# Altium PCB Printhead.PcbDoc
Units mm, origin at the board's own origin, x right, y up, seen from the top; angles counter-clockwise.
Board outline 36 x 57.8 mm, 4 copper layers (Component Side, Signal Layer 1, Signal Layer 2, Solder Side), stack 0.98 mm thick; 91 components, 46 nets, 258 pads, 114 vias.
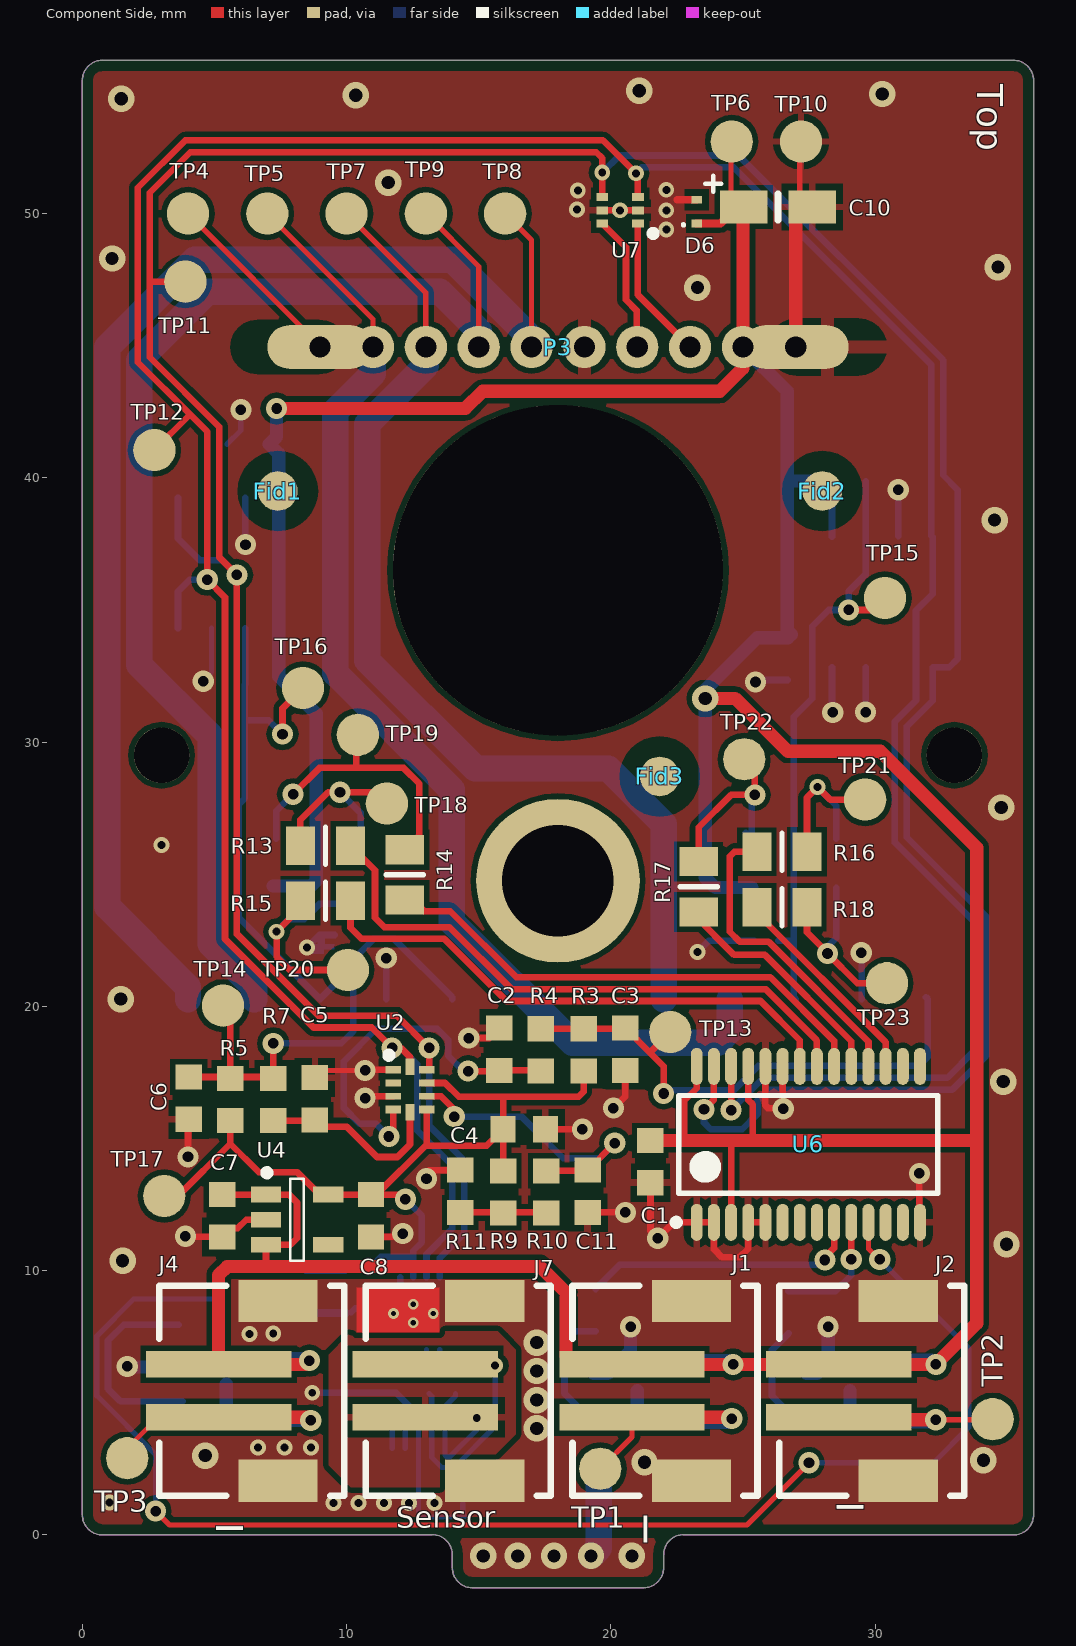
[diagram p0: Component Side view]
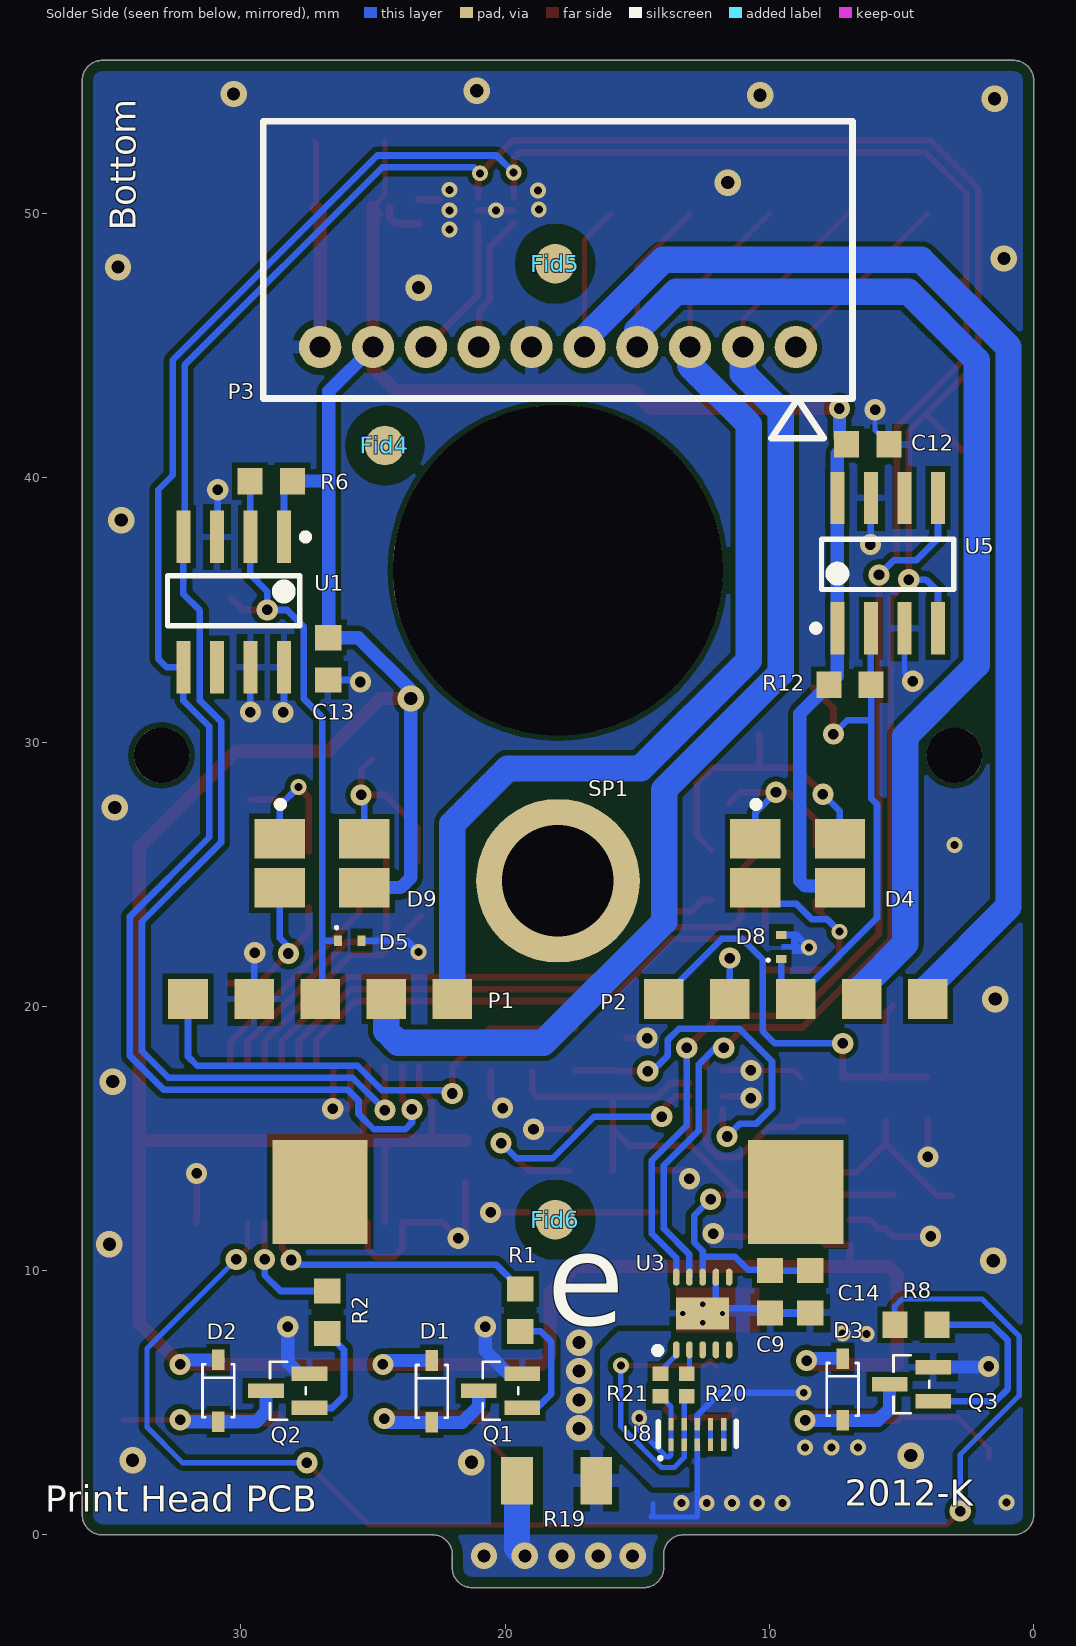
[diagram p1: Solder Side view, seen from below]
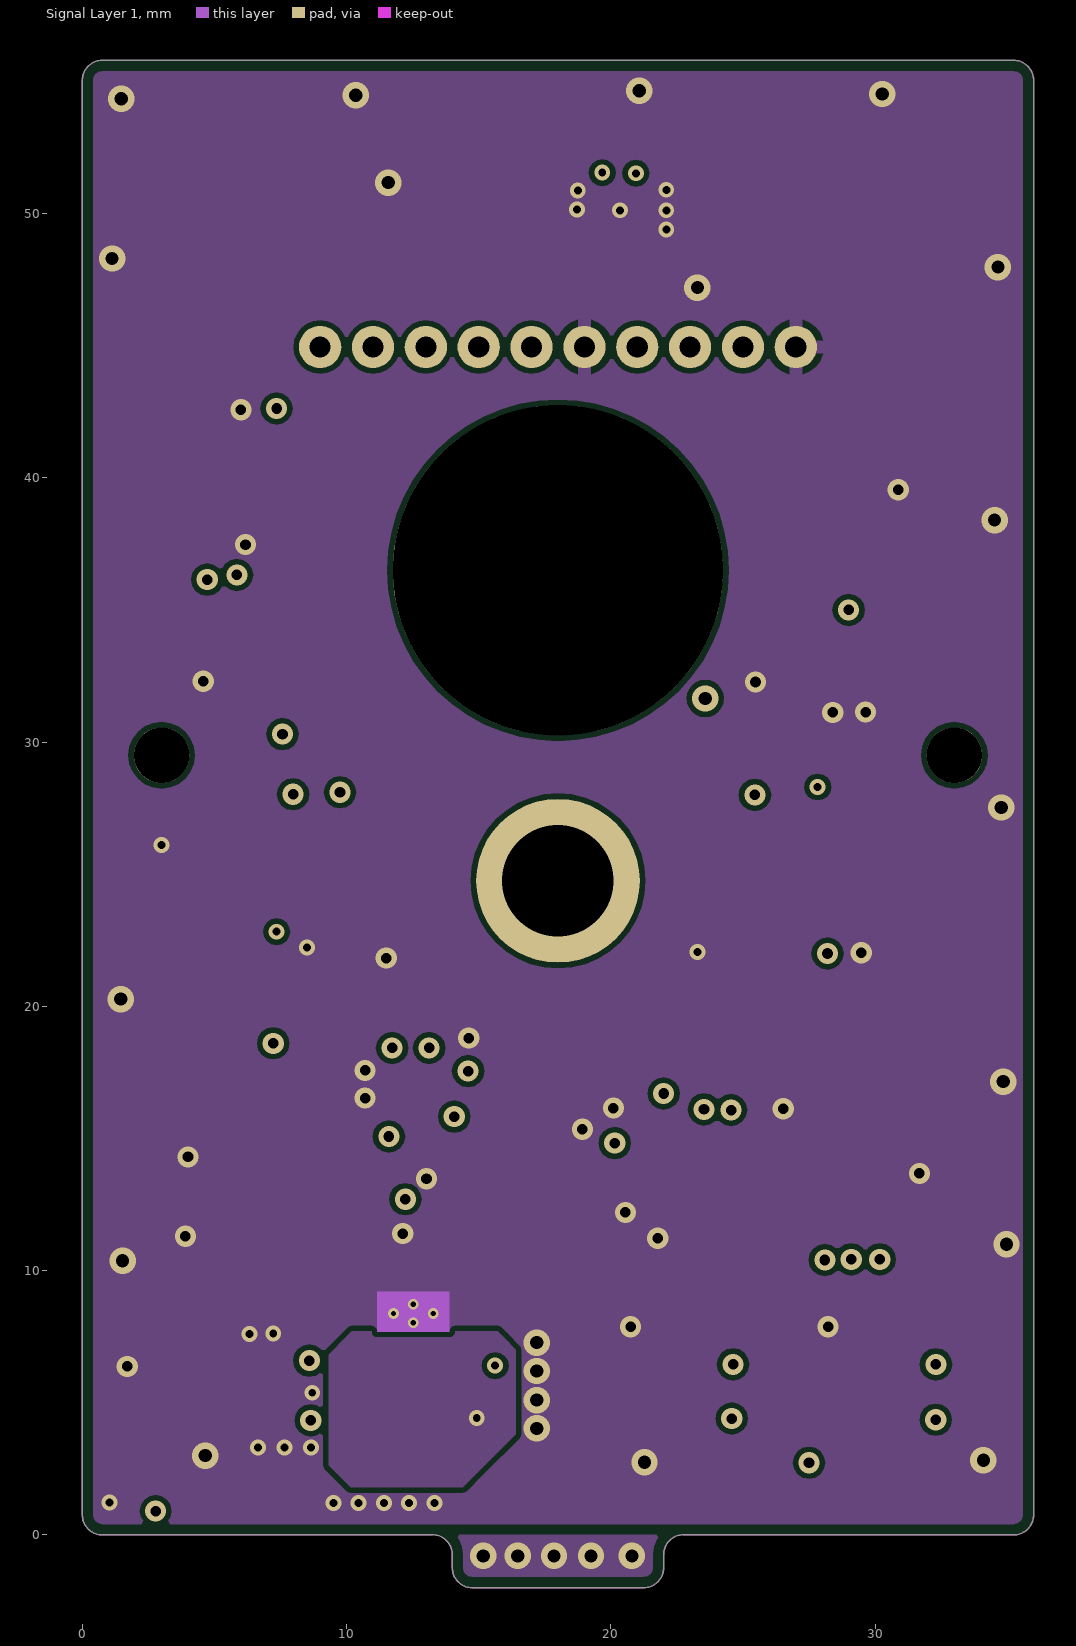
[diagram p2: Signal Layer 1]
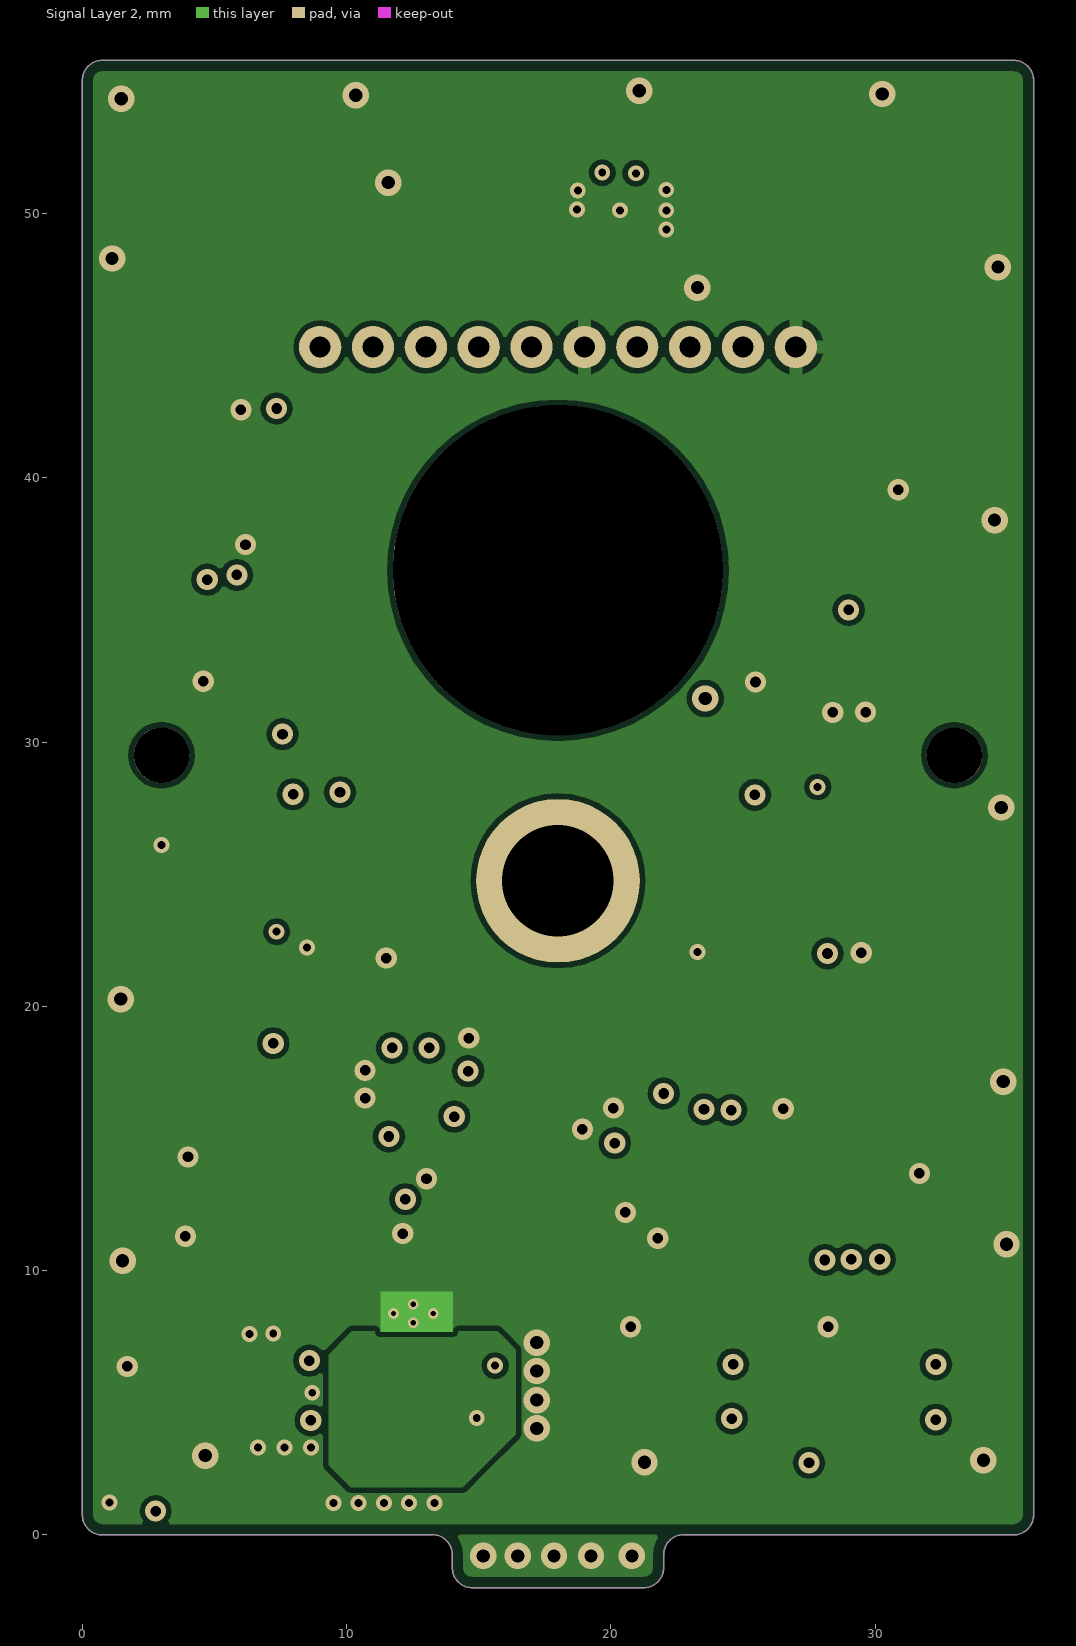
[diagram p3: Signal Layer 2]

## Layer stack, top to bottom
Top Solder: solder mask 0.0102, Solder Resist, Dk 3.5
Component Side: signal copper 0.0356
Dielectric1: core 0.32, FR-4, Dk 4.8
Signal Layer 1: signal copper 0.036
Dielectric2: prepreg 0.2625, Dk 4.2
Signal Layer 2: signal copper 0.036
Dielectric3: core 0.254, Dk 4.2
Solder Side: signal copper 0.0356
Bottom Solder: solder mask 0.0102, Solder Resist, Dk 3.5

## Board outline
13.25,0 cw(c13.25,-0.75) 14,-0.75 14,-1.25 ccw(c14.75,-1.25) 14.75,-2 21.25,-2 ccw(c21.25,-1.25) 22,-1.25 22,-0.75 cw(c22.75,-0.75) 22.75,0 35.25,0 ccw(c35.25,0.75) 36,0.75 36,55.05 ccw(c35.25,55.05) 35.25,55.8 0.75,55.8 ccw(c0.75,55.05) 0,55.05 0,0.75 ccw(c0.75,0.75) 0.75,0

## Design rules (kind name [scope] priority, off if disabled: settings)
Clearance Clearance_USB_GND [InNet('USB_GND')] p1: gap=0.4
Clearance Clearance_U1_to_copper [InComponent('U2') vs InPolygon] p2: gap=0.2
Clearance Clearance_U2 [InComponent('U2')] p3: gap=0.1
Clearance Fiducials [(InComponent('Fid1'))or (InComponent('Fid2'))or  (InComponent('Fid3'))or (InComponent('Fid4'))or (InComponent('Fid5'))or  (InComponent('Fid6'))] p4: gap=0.762
Clearance Outline_clearance [InPolygon vs OnLayer('Keep-Out Layer')] p5: gap=0.4
Clearance [All] p6: gap=0.2
MinimumSolderMaskSliver [All] p1: minsoldermaskwidth=0.051
PolygonConnect PolygonConnect_connectors [InComponent('J4', 'J7', 'J1', 'J2') vs InNet('GND')] p1: connectstyle=Direct reliefconductorwidth=0.254 reliefentries=4 polygonreliefangle="90 Angle" airgapwidth=0.254
PolygonConnect PolygonConnect_P3 [InComponent('P3', 'R19')] p2: connectstyle=Relief reliefconductorwidth=0.508 reliefentries=4 polygonreliefangle="90 Angle" airgapwidth=0.254
PolygonConnect PolygonConnect_diodes [InComponent('D6') or InComponent('D9') or InComponent('D8')] p3: connectstyle=NoConnect reliefconductorwidth=0.254 reliefentries=4 polygonreliefangle="90 Angle" airgapwidth=0.254
PolygonConnect PolygonConnect_SHIELD [All vs IsVia] p4: connectstyle=Direct reliefconductorwidth=0.254 reliefentries=4 polygonreliefangle="90 Angle" airgapwidth=0.254
PolygonConnect [All] p5: connectstyle=Relief reliefconductorwidth=0.254 reliefentries=4 polygonreliefangle="90 Angle" airgapwidth=0.254
RoutingVias [All] p1: holewidth=0.711 width=1.27 viastyle="Through Hole" minholewidth=0.3 minwidth=0.7 maxholewidth=0.711 maxwidth=1.27
SilkToSilkClearance [All] p1: silktosilkclearance=0
SilkToSolderMaskClearance [IsPad] p1: minsilkscreentomaskgap=0.127 clearancetoexposedcopper=TRUE
SolderMaskExpansion [All] p1: expansion=0.102
Width [All] p1: maxlimit=4 minlimit=0.2 preferedwidth=0.2
27 further rules are at their usual default settings.

## Classes and differential pairs
component class Printhead: C2 C3 C4 C5 C6 C7 C8 C9 C10 C11 C12 C13 C14 D6 D8 D9 Fid1 Fid2 Fid3 Fid4 Fid5 Fid6 J7 P1 P2 P3 R3 R4 R5 R6 R7 R9 R10 R11 R12 R19 R20 R21 SP1 TP4 TP5 TP6 TP7 TP8 TP9 TP10 TP11 TP12 TP13 TP14 TP15 TP16 TP17 U1 U2 U3 U4 U5 U7 U8
component class Printhead2: C1 D1 D2 D3 D4 D5 J1 J2 J4 Q1 Q2 Q3 R1 R2 R8 R13 R14 R15 R16 R17 R18 TP1 TP2 TP3 TP18 TP19 TP20 TP21 TP22 TP23 U6

## Components (designator, comment, footprint, x,y, rotation, side; value= is the part's Value field where it differs from the comment)
C1 "100nF" CAPC1608X09N 21.5,14.125 r90 top
C2 "1uF" CAPC1608X09N 15.775,18.375 r270 top
C3 "100nF" CAPC1608X09N 20.55,18.375 r90 top
C4 "100nF" CAPC1608X09N 16.725,15.35 r180 top
C5 "1uF" CAPC1608X09N 8.8,16.5 r270 top
C6 "100nF" CAPC1608X09N 4.025,16.525 r90 top
C7 "1uF" CAPC1608X09N 5.3,12.075 r90 top
C8 "2.2uF" CAPC1608X09N 10.925,12.075 r90 top
C9 "100nF" CAPC1608X09N 9.975,9.2 r90 bottom
C10 "10uF" CAPMP3216X18N 26.325,50.25 r0 top
C11 "1uF" CAPC1608X09N 19.125,13 r90 top
C12 "100nF" CAPC1608X09N 6.275,41.275 r0 bottom
C13 "100nF" CAPC1608X09N 26.7,33.15 r90 bottom
C14 "1uF" CAPC1608X09N 8.45,9.2 r90 bottom
D1 "DB2J50100L" SODFL2512X80N 22.775,5.425 r270 bottom
D2 "DB2J50100L" SODFL2512X80N 30.85,5.45 r270 bottom
D3 "DB2J50100L" SODFL2512X80N 7.225,5.5 r270 bottom
D4 "LED RGB" "DIALIGHT 598-8610-307F" 8.932,25.417 r180 bottom locked
D5 "LED RGB" "DIALIGHT 598-8610-307F" 26.932,25.417 r180 bottom locked
D6 "ESD9X5.0ST5G" SODFL100X40-2N 23.25,50.075 r90 top
D8 "ESD9L5.0ST5G" SODFL100X40-2N 9.546,22.248 r90 bottom
D9 "ESD9L5.0ST5G" SODFL100X40-2N 25.879,22.475 r180 bottom
Fid1 "Fiducial" "Fiducial 1,5mm"#1 8,39.5 r0 top
Fid2 "Fiducial" "Fiducial 1,5mm"#2 48.325,38.925 r90 top
Fid3 "Fiducial" "Fiducial 1,5mm"#1 21.85,29.3 r90 top
Fid4 "Fiducial" "Fiducial 1,5mm"#1 24.55,41.825 r90 bottom
Fid5 "Fiducial" "Fiducial 1,5mm"#3 20.05,48.7 r90 bottom
Fid6 "Fiducial" "Fiducial 1,5mm"#4 18.175,12.525 r90 bottom
J1 "B2B-PH-SM4-TB" B2B-PH-SM4-TB 18.05,1.475 r270 top locked
J2 "B2B-PH-SM4-TB" B2B-PH-SM4-TB 25.875,1.475 r270 top locked
J4 "B2B-PH-SM4-TB" B2B-PH-SM4-TB 2.408,1.475 r270 top locked
J7 "B2B-PH-SM4-TB" B2B-PH-SM4-TB 10.225,1.475 r270 top locked
P1 "Header 5" "AVX 9155005003016" 33.25,11 r0 bottom locked
P2 "Header 5" "AVX 9155005003016" 15.25,11 r0 bottom locked
P3 "353631060" 353631060 18,53.5 r180 bottom locked
Q1 "PBSS4140U" SOT65P210X110-3N 20.175,5.45 r0 bottom
Q2 "PBSS4140U" SOT65P210X110-3N 28.225,5.45 r0 bottom
Q3 "PBSS4140U" SOT65P210X110-3N 4.625,5.7 r0 bottom
R1 "330E" RESC1608X05N 19.425,8.5 r270 bottom
R2 "330E" RESC1608X05N 26.725,8.425 r270 bottom
R3 "1k21 0.1%" RESC1608X05N 18.975,18.35 r270 top
R4 "330E" RESC1608X05N 17.35,18.35 r90 top
R5 "1k21 0.1%" RESC1608X05N 5.6,16.475 r270 top
R6 "1K5" RESC1608X05N 28.85,39.875 r180 bottom
R7 "330E" RESC1608X05N 7.225,16.475 r90 top
R8 "330E" RESC1608X05N 4.45,7.95 r180 bottom
R9 "1k21 0.1%" RESC1608X05N 15.925,12.975 r90 top
R10 "330E" RESC1608X05N 17.55,12.975 r270 top
R11 "205R 0.1%" RESC1608X05N 14.3,13 r270 top
R12 "1K5" RESC1608X05N 6.95,32.175 r0 bottom
R13 "100E" "R0805 (2012)" 9.2,26.075 r180 top
R14 "150E" "R0805 (2012)" 12.2,24.975 r90 top
R15 "100E" "R0805 (2012)" 9.2,24 r180 top
R16 "100E" "R0805 (2012)" 26.475,25.85 r0 top
R17 "150E" "R0805 (2012)" 23.325,24.525 r90 top
R18 "100E" "R0805 (2012)" 26.475,23.75 r0 top
R19 "0R" R1206 18.05,2.05 r180 bottom
R20 "0402" cap0402 13.125,5.675 r270 bottom
R21 "0402" cap0402 14.125,5.675 r270 bottom
SP1 "M2.5-2ET" "SPACER M25-2ET" 18,24.75 r180 bottom locked
TP1 "Testpoint 1.6mm" "Testpoint 1.6mm"#1 19.6,2.5 r0 top
TP2 "Testpoint 1.6mm" "Testpoint 1.6mm"#1 34.45,4.375 r90 top
TP3 "Testpoint 1.6mm" "Testpoint 1.6mm"#1 1.7,2.9 r90 top
TP4 "Testpoint 1.6mm" "Testpoint 1.6mm"#2 4.95,50 r90 top
TP5 "Testpoint 1.6mm" "Testpoint 1.6mm"#3 8.125,50.05 r90 top
TP6 "Testpoint 1.6mm" "Testpoint 1.6mm"#1 24.575,52.725 r90 top
TP7 "Testpoint 1.6mm" "Testpoint 1.6mm"#4 11.15,50.05 r90 top
TP8 "Testpoint 1.6mm" "Testpoint 1.6mm"#5 16.6,50.05 r90 top
TP9 "Testpoint 1.6mm" "Testpoint 1.6mm"#6 14,50.025 r90 top
TP10 "Testpoint 1.6mm" "TESTPOINT 1.6MM"#1 27.2,52.8 r90 top
TP11 "Testpoint 1.6mm" "Testpoint 1.6mm"#7 3.9,47.5 r90 top
TP12 "Testpoint 1.6mm" "Testpoint 1.6mm"#8 2.275,41.175 r90 top
TP13 "Testpoint 1.6mm" "TESTPOINT 1.6MM"#2 22.25,19.025 r90 top
TP14 "Testpoint 1.6mm" "TESTPOINT 1.6MM"#2 5.325,20.025 r90 top
TP15 "Testpoint 1.6mm" "Testpoint 1.6mm"#1 30.375,35.45 r90 top
TP16 "Testpoint 1.6mm" "TESTPOINT 1.6MM"#2 8.35,32.05 r90 top
TP17 "Testpoint 1.6mm" "TESTPOINT 1.6MM"#2 3.1,12.825 r90 top
TP18 "Testpoint 1.6mm" "Testpoint 1.6mm"#1 11.525,27.675 r90 top
TP19 "Testpoint 1.6mm" "Testpoint 1.6mm"#1 10.425,30.275 r90 top
TP20 "Testpoint 1.6mm" "Testpoint 1.6mm"#1 10.05,21.375 r90 top
TP21 "Testpoint 1.6mm" "Testpoint 1.6mm"#1 29.625,27.825 r90 top
TP22 "Testpoint 1.6mm" "Testpoint 1.6mm"#1 25.05,29.35 r90 top
TP23 "Testpoint 1.6mm" "Testpoint 1.6mm"#1 30.45,20.875 r90 top
U1 "DS2482-100" SOIC127P600X175-8N 30.275,35.3 r270 bottom
U2 "ADS1015IRUG" TI-RUG10_V 12.4,16.85 r270 top
U3 "FDC1004DSCT" SON50P300X300X80-11N 12.525,8.375 r90 bottom
U4 "LP2985A-33DBV" SOT95P275X110-5N 8.125,11.925 r0 top
U5 "DS2482-100" SOIC127P600X175-8N 5.525,36.775 r90 bottom
U6 "PCA9635" TSOP65P640X110-28N 27.475,14.775 r90 top locked
U7 "NUF2230" SOTFL50P160X60-6N 20.35,50.125 r180 top
U8 "PUSB3FR4" QFN0P250X100X50-10N 12.725,3.8 r180 bottom

## Footprints (in the part's own frame and the unit in brackets; to place one, negate y for a bottom-side part, rotate by r counter-clockwise, add the part's x,y. Pads: shape width x height; smd on the part's side, far side on the other; paste and mask are expansions set on the pad)
353631060 [mm] "Molex 353631060"
  oval 4x1.65 smd far side paste-2 mask+0: 1(9,-8.55) 10(-9,-8.55)
  round 1.6 hole 0.8: 1(9,-8.55) 2(7,-8.55) 3(5,-8.55) 4(3,-8.55) 5(1,-8.55) 6(-1,-8.55) 7(-3,-8.55) 8(-5,-8.55) 9(-7,-8.55) 10(-9,-8.55)
  silkscreen extent -11.15,-12 11.15,0, body extent -11.15,-10.5 11.15,0, height 5.5
"AVX 9155005003016" [mm] "CONNECTOR, BATTERY, 5 POS, 2.3MM"
  rect 3.6x3.95 smd: 0(-6.25,-1.975)
  rect 1.5x1.5 smd: 1(-1.25,-9.275) 2(-3.75,-9.275) 3(-6.25,-9.275) 4(-8.75,-9.275) 5(-11.25,-9.275)
  body extent -12.5,-9.55 0,0, height 5.48
B2B-PH-SM4-TB [mm] "JST B2B-PH-SM4-TB"
  rect 1.6x3 smd: 0(-7.375,5) 0(-0.575,5)
  rect 1x5.5 smd: 1(-4.975,2.75) 2(-2.975,2.75)
  silkscreen extent -7.95,0.5 0,7.5, body extent -7.95,0.5 0,7.5, height 6.61
cap0402 [mm] "0402"
  rect 0.55x0.6 smd: 1(-0.425,0) 2(0.425,0)
  body extent -0.55,-0.3 0.55,0.3, height 0.4
CAPC1608X09N [mm] "Chip Capacitor, 2-Leads, Body 1.6x0.8mm, IPC Medium Density"
  rect 0.95x1 smd: 1(-0.8,0) 2(0.8,0)
  Component Side pour cut-out: -0.3,0.6 0.3,0.6 0.3,-0.6 -0.3,-0.6
  body extent -0.85,-0.45 0.85,0.45, height 0.9
CAPMP3216X18N [mm] "Molded Capacitor, 2-Leads, Body 3.2x1.6mm, IPC Medium Density"
  rect 1.8x1.25 smd: 1(-1.3,0) 2(1.3,0)
  silkscreen extent -2.75,-0.51 0,1.17, body extent -1.7,-0.9 1.7,0.9, height 1.8
"DIALIGHT 598-8610-307F" [mm] "Dialight RGB led"
  rect 1.9x1.5 smd: 1(-1.6,0.925) 2(1.6,0.925) 3(-1.6,-0.925) 4(1.6,-0.925)
  silkscreen extent -1.7,2.1 -1.45,2.35, body extent -1.6,-1.35 1.6,1.35, height 0.7
"Fiducial 1,5mm"#1 [mm] "Fiducial 1,5mm"
  round 1.5 smd paste-3 mask+0.75: ""(-0.6,0)
"Fiducial 1,5mm"#2 [mm] "Fiducial 1,5mm"
  round 1.5 smd paste-3 mask+0.75: ""(0.575,20.325)
"Fiducial 1,5mm"#3 [mm] "Fiducial 1,5mm"
  round 1.5 smd paste-3 mask+0.75: ""(-0.6,-1.95)
"Fiducial 1,5mm"#4 [mm] "Fiducial 1,5mm"
  round 1.5 smd paste-3 mask+0.75: ""(-0.6,-0.075)
QFN0P250X100X50-10N [mm] "QFN, 10-Leads, Body 2,50x1,00mm, Pitch 0,50mm/0,00mm, IPC Medium Density"
  rect 0.2x0.475 smd: 1(-1,-0.387) 1(-1,0.387) 2(-0.5,-0.387) 2(-0.5,0.387) 3(0,-0.387) 3(0,0.387) 4(0.5,-0.387) 4(0.5,0.387) 5(1,-0.387) 5(1,0.387)
  Component Side lines w0.2: 1,-0.525 1,-0.387 1,0.387 1,0.525 ; 0.5,-0.525 0.5,-0.387 0.5,0.387 0.5,0.525 ; 0,-0.525 0,-0.387 0,0.387 0,0.525 ; -0.5,-0.525 -0.5,-0.387 -0.5,0.387 -0.5,0.525 ; -1,-0.525 -1,-0.387 -1,0.387 -1,0.525
  silkscreen extent -1.48,-0.92 1.48,0.5, body extent -1.3,-0.55 1.3,0.55, height 0.5
"R0805 (2012)" [mm] "hip Resistor, 2-Leads, Body 2,0x1.25mm, IPC Medium Density"
  rect 1.1x1.45 smd: 1(-0.95,0) 2(0.95,0)
  silkscreen extent 0,-0.7 0,0.7, body extent -1,-0.6 1,0.65, height 0.44
R1206 [mm]
  rect 1.2x1.8 smd: 1(-1.5,0) 2(1.5,0)
  body extent -1.6,-0.8 1.6,0.8, height 0.55
RESC1608X05N [mm] "Chip Resistor, 2-Leads, Body 1.6x0.8mm, IPC Medium Density"
  rect 0.95x1 smd: 1(-0.8,0) 2(0.8,0)
  Component Side pour cut-out: -0.3,0.6 0.3,0.6 0.3,-0.6 -0.3,-0.6
  body extent -0.85,-0.48 0.85,0.47, height 0.5
SODFL100X40-2N [mm] "SODFL, 2-Leads, Body 0,60x1,00mm, IPC Medium Density"
  rect 0.3x0.4 smd: 1(-0.45,0) 2(0.45,0)
  silkscreen extent -0.55,0.45 -0.45,0.55, body extent -0.42,-0.33 0.43,0.33, height 0.4
SODFL2512X80N [mm]
  rect 0.78x0.47 smd: 1(-1.17,0) 2(1.17,0)
  silkscreen extent -1,-0.6 1,0.6, body extent -1,-0.6 1,0.6, height 0.75
SOIC127P600X175-8N [mm] "SOIC, 8-Leads, Body 4,90x3,90mm, Pitch 1,27mm, IPC Medium Density"
  rect 1.98x0.53 smd: 1(-2.465,1.905) 2(-2.465,0.635) 3(-2.465,-0.635) 4(-2.465,-1.905) 5(2.465,-1.905) 6(2.465,-0.635) 7(2.465,0.635) 8(2.465,1.905)
  silkscreen extent -2.59,-2.5 0.9,2.84, body extent -2,-2.5 2,2.5, height 1.75
SON50P300X300X80-11N [mm]
  oval 0.65x0.25 smd mask+0.07: 1(-1.375,1) 2(-1.375,0.5) 3(-1.375,0) 4(-1.375,-0.5) 5(-1.375,-1) 6(1.375,-1) 7(1.375,-0.5) 8(1.375,0) 9(1.375,0.5) 10(1.375,1)
  rect 1.2x2 smd mask+0.07: 11(0,0)
  silkscreen extent -1.52,1.58 -1.28,1.83, body extent -1.5,-1.5 1.5,1.5, height 0.8
SOT65P210X110-3N [mm] "SOT23, 3-Leads, Body 2.2x2.2mm (max), Pitch 0.65mm, IPC Medium Density"
  rect 1.35x0.55 smd: 1(-0.825,0.65) 2(-0.825,-0.65) 3(0.825,0)
  silkscreen extent -0.67,-1.1 0.67,1.1, body extent -0.67,-1.1 0.67,1.1, height 1.1
SOT95P275X110-5N [mm] "SOT23, 5-Leads, Body 3.1x3.0mm (max), Pitch 0.95mm, IPC Medium Density"
  rect 1.15x0.6 smd: 1(-1.175,0.95) 2(-1.175,0) 3(-1.175,-0.95) 4(1.175,-0.95) 5(1.175,0.95)
  silkscreen extent -1.27,-1.55 0.25,1.9, body extent -1.4,-1.45 1.4,1.45, height 1.2
SOTFL50P160X60-6N [mm] "SOTFL, 6-Leads, Body 1,60x1,60mm, Pitch 0,50mm, IPC Medium Density"
  rect 0.45x0.3 smd: 1(-0.675,0.5) 2(-0.675,0) 3(-0.675,-0.5) 4(0.675,-0.5) 5(0.675,0) 6(0.675,0.5)
  silkscreen extent -1.38,0.75 -1.13,1, body extent -0.65,-0.85 0.65,0.85, height 0.6
"SPACER M25-2ET" [mm] "Spacer M25-2ET"
  round 6.2 hole 4.22 unplated: 0(0,0)
  body extent -2.75,-2.75 2.75,2.75, height 2
"Testpoint 1.6mm"#1 [mm]
  round 1.6 smd paste-2 mask+0: 1(0,0)
"Testpoint 1.6mm"#2 [mm]
  round 1.6 smd paste-2 mask+0: 1(0,0.95)
"Testpoint 1.6mm"#3 [mm]
  round 1.6 smd paste-2 mask+0: 1(-0.05,1.125)
"Testpoint 1.6mm"#4 [mm]
  round 1.6 smd paste-2 mask+0: 1(-0.05,1.15)
"Testpoint 1.6mm"#5 [mm]
  round 1.6 smd paste-2 mask+0: 1(-0.05,0.6)
"Testpoint 1.6mm"#6 [mm]
  round 1.6 smd paste-2 mask+0: 1(-0.025,1)
"Testpoint 1.6mm"#7 [mm]
  round 1.6 smd paste-2 mask+0: 1(-0.075,0)
"Testpoint 1.6mm"#8 [mm]
  round 1.6 smd paste-2 mask+0: 1(-0.125,-0.45)
"TESTPOINT 1.6MM"#1 [mm]
  round 1.6 smd paste-2 mask+0: 1(-0.075,0)
"TESTPOINT 1.6MM"#2 [mm]
  round 1.6 smd paste-2 mask+0: 1(0,0)
TI-RUG10_V [mm] "QFN, 10-Leads, Body 2x1.5mm"
  rect 0.3x0.58 smd: 1(-0.75,-0.635) 4(0.75,-0.635) 6(0.75,0.635) 9(-0.75,0.635)
  rect 0.25x0.58 smd: 2(-0.25,-0.635) 3(0.25,-0.635) 7(0.25,0.635) 8(-0.25,0.635)
  rect 0.63x0.35 smd: 5(0.86,0) 10(-0.86,0)
  silkscreen extent -1.42,-0.92 -1.18,-0.67, body extent -1,-0.75 1,0.75, height 0.4
TSOP65P640X110-28N [mm] "TSOP, 28-Leads, Body 9,70x4,40mm, Pitch 0,65mm, IPC Medium Density"
  oval 1.4x0.45 smd: 1(-2.95,4.225) 2(-2.95,3.575) 3(-2.95,2.925) 4(-2.95,2.275) 5(-2.95,1.625) 6(-2.95,0.975) 7(-2.95,0.325) 8(-2.95,-0.325) 9(-2.95,-0.975) 10(-2.95,-1.625) 11(-2.95,-2.275) 12(-2.95,-2.925) 13(-2.95,-3.575) 14(-2.95,-4.225) 15(2.95,-4.225) 16(2.95,-3.575) 17(2.95,-2.925) 18(2.95,-2.275) 19(2.95,-1.625) 20(2.95,-0.975) 21(2.95,-0.325) 22(2.95,0.325) 23(2.95,0.975) 24(2.95,1.625) 25(2.95,2.275) 26(2.95,2.925) 27(2.95,3.575) 28(2.95,4.225)
  silkscreen extent -3.07,-4.9 1.85,5.12, body extent -2.25,-4.9 2.25,4.9, height 1.1

## Part data
C1 C3 C4 C6 C9 C12 C13: library part 100nF/50V/0603, "CAP CER 0.1UF 50V 10% X7R 0603"
C2 C5 C7 C11 C14: library part 1uF/10V/0603, "CAP CER 1UF 10V 10% X5R 0603"
C8: library part 2.2.uF/10V/0603, "CAP CER 2.2UF 10V 20% X5R 0603"
C10: library part 10uF/10V/SizeA, "CAP TANT 10UF 10V 20% 1206"
D1 D2 D3: "DIODE SCHOTTKY 50V 200MA MINI2"
D4 D5: library part "LED 598-8810-307F", "LED MULTICOLOR RED/GRN/BLUE"
D6: "TVS DIODE 5VWM 12.3VC SOD923"
Fid1 Fid2 Fid3 Fid4 Fid5 Fid6: library part Library_MISC-0003
J1 J2 J4 J7: library part "Header 2", "JST B2B-PH-SM4-TB"
P1 P2: "Header, 5-Pin"
P3: library part "Header 5X2", "Molex 353631060"
Q1 Q2 Q3: "TRANS NPN 40V 1000MA SOT323"
R1 R2 R4 R7 R8 R10: library part 330E/0603, "RES 330 OHM 1/10W 1% 0603 SMD"
R3 R5 R9: library part 1k21/0.1%/0603, "RES 1.21K OHM 1/16W 0.1% 0603"
R6 R12: library part "Res 4.7K 0805", "Res 1K5 0603 1% 100mW"
R11: library part 205/0.1%/0603, "RES 205 OHM 1/10W .1% 0603 SMD"
R13 R15 R16 R18: library part "Res 100E 0805", "Res 100E 0805 1% 125mW"
R14 R17: library part "Res 150E 0805", "Res 150E 0805 1% 125mW"
R19: library part Library_RES-0001, "RO RES 0R 1% 0,25W 1206"
R20 R21: library part R0402, "100E 1%"
SP1: "MOER-SMD SMTSO-M25-2ET  PEM"
U1 U5: "Single-Channel 1-Wire Master"
U2: "12-Bit ADC with Integrated Multiplexer, PGA, Comparator, Oscillator, and Reference, -40 to 125 degC, 10-pin X2QFN (RUG10), Green (RoHS & no Sb/Br)"
U3: "IC CAPACITIVE SENSING 4CH 10WSON"
U4: "IC REG LDO 3.3V 0.15A SOT23-5"
U6: "16-bit Fm+ I2C-bus LED driver"
U8: "4 lines ESD protection"

## Free pads (board coordinates)
  round 2.1 hole 2.1 unplated: 0(3,29.5) 0(33,29.5)
  round 12.5 hole 12.5 unplated: 0(18,36.5)

## Via types
v1: diameter 0.8, hole 0.4, Component Side to Solder Side, tented both sides, 56 vias
v2: diameter 0.6, hole 0.3, Component Side to Solder Side, tented both sides, 23 vias
v3: diameter 1, hole 0.5, Component Side to Solder Side, tented both sides, 22 vias
v4: diameter 1, hole 0.5, Component Side to Solder Side, 5 vias
v5: diameter 0.4, hole 0.2, Component Side to Solder Side, tented bottom, 4 vias
v6: diameter 0.6, hole 0.3, Component Side to Solder Side, tented bottom, 2 vias
v7: diameter 0.6, hole 0.3, Component Side to Solder Side, 2 vias

## Nets (pads, with @x,y where several pads share a name; then routed paths per layer and width w, separated by ;. In a path a pad name is that pad's centre, name@x,y a point inside that pad or via, vN(x,y) a via of type N, cw(c..) or ccw(c..) an arc to the next point about the centre after c; other vN are vias at no path point)
1-WIRE_1: D9.1 P1.3 R6.1 TP15.1 U1.2 | length 23.3
  Component Side w0.25: v1(29,35) 29.925,35 TP15.1
  Solder Side w0.25: D9.1 26.925,22.475 ; P1.3 26.925,20.35 26.925,22.475 ; R6.1@29.64,39.865 U1.2 29.64,36.34 29,35.7 v1(29,35) 28.25,35 27.625,34.375 27.625,31.65 26.925,30.95 26.925,22.475
1-WIRE_2: D8.1 P2.3 R12.1 TP16.1 U5.2 | length 20.9
  Component Side w0.25: v1(7.575,30.3) 7.575,31.275 TP16.1
  Solder Side w0.25: 6.15,30.825 7.05,30.825 v1(7.575,30.3) ; R12.1 6.15,27.875 5.925,27.65 5.925,23.35 P2.3 9.546,20.821 D8.1 ; R12.1@6.16,32.185 U5.2
+3.3V: C4.2 C8.2 C9.2 C14.2 R3.2 R5.2 R9.2 TP17.1 U2.6 U2.8 U3.8 U4.5 | length 36.3
  Component Side w0.25: TP17.1 3.625,12.825 5.6,14.8 ; R5.2 5.6,14.8 ; v1(12.225,12.7) 12.05,12.875 C8.2@11.136,12.875 ; 13.035,14.725 15.3,14.725 C4.2 ; U2.6 13.035,14.774 C8.2@11.136,12.875 ; U2.8 13.725,17.1 14.25,16.575 15.925,16.575 ; R9.2 C4.2 ; R3.2 18.975,16.775 18.775,16.575 15.925,16.575 ; 5.6,14.8 6.675,13.725 8.129,13.725 8.979,12.875 U4.5 C8.2 C8.2@11.136,12.875 ; C4.2 15.925,16.575
  Solder Side w0.25: C14.2 C9.2@9.95,10 ; C9.2@9.975,10.025 10.8,10.025 11.3,10.525 12.525,10.525 ; v1(12.225,12.7) 12.85,12.075 12.85,11.073 12.525,10.748 12.525,10.525 ; U3.8 12.525,10.525
+5V: C1.2 C7.2 C10.1 C12.2 C13.2 D1.1 D2.1 D3.1 D4.4 D5.4 D6.1 J1.1 J2.1 J4.1 P3.9 R6.2 R12.2 TP6.1 U1.1 U4.1 U4.3 U5.1 U5.8 U6.3 U6.25 U6.28 | length 179.4
  Component Side w0.2: TP6.1 24.55,52.7 24.55,50.7 C10.1@25,50.25
  Component Side w0.25: C7.2 U4.1 7.825,12.875 8.125,12.575 8.125,11.225 7.875,10.975 U4.3 6.95,10.15 6.95,10.125 6.925,10.1 ; U6.3 24.55,14.9
  Component Side w0.254: 22.775,14.925 22.775,16.425 23.25,16.9 U6.28 ; U6.25 25.2,16.453 25.375,16.278 25.375,14.925
  Component Side w0.3: D6.1 24.15,49.625 24.375,49.85 C10.1@24.375,50.225 ; C10.1@24.775,50 25,50.225 C10.1
  Component Side w0.5: v1(7.35,42.625) 14.5,42.625 15.15,43.275 24.125,43.275 25,44.15 P3.9 25,50.225 C10.1@25,50.25 ; v1(8.591,6.591) 8.45,6.45 J4.1 5.158,9.833 5.475,10.15 6.95,10.15 17.325,10.15 18.3,9.175 ; 18.3,8.975 18.3,6.775 18.625,6.45 J1.1 v1(24.625,6.45) J2.1 v1(32.3,6.45) 33.85,8 33.85,26 30.2,29.65 26.7,29.65 24.7,31.65 v3(23.575,31.65) ; C1.2 25.375,14.925 33.85,14.925
  Solder Side w0.25: U1.1 R6.2@28.37,39.555
  Solder Side w0.5: D4.4@7.224,24.55 8.65,24.55 8.85,24.75 8.85,31.075 R12.2 7.43,32.495 U5.1 U5.8 7.43,40.92 C12.2 7.35,41.55 v1(7.35,42.625) ; D3.1 8.591,6.67 v1(8.591,6.591) ; D1.1 24.48,6.595 v1(24.625,6.45) ; P3.9 26.675,43.275 26.675,34.225 C13.2@26.825,34.075 ; D5.4 23.958,24.492 23.575,24.875 v3(23.575,31.65) 23.575,31.975 25.55,33.95 C13.2 ; 26.825,39.875 R6.2 ; D2.1 32.13,6.62 v1(32.3,6.45)
+24V: P3.1 TP4.1 | length 7.1
  Component Side w0.2: TP4.1 9,45 P3.1@9,44.95
BLUE_L: R18.1 U6.17 | length 8
  Component Side w0.25: R18.1 25.525,23.523 30.4,18.648 U6.17
BLUE_R: R15.1 U6.22 | length 20.8
  Component Side w0.25: R15.1 10.15,22.975 10.575,22.55 13.702,22.55 16.052,20.2 25.666,20.2 27.15,18.716 U6.22
CAPSENSOR: J7.1 R20.2 U8.2 | length 10.7
  Component Side w0.2: J7.1@12,6.364 12.236,6.6 12.432,6.405 v6(15.621,6.405)
  Solder Side w0.2: R20.2@13.125,5.35 13.225,5.25 U8.2@13.225,4.325 ; U8.2@13.225,3.275 13.225,2.925 13.6,2.55 14.074,2.55 15.621,4.097 v6(15.621,6.405)
GND: C1.1 C2.1 C3.1 C4.1 C5.1 C6.1 C7.1 C8.1 C9.1 C10.2 C11.1 C12.1 C13.1 C14.1 D6.2 D8.2 D9.2 J1.0 J2.0 J4.0 J7.0 P1.2 P2.2 P3.6 P3.10 Q1.2 Q2.2 Q3.2 R11.1 R19.2 TP10.1 U1.3 U1.7 U1.8 U2.1 U2.3 U3.7 U3.11 U4.2 U5.3 U5.7 U6.1 U6.2 U6.4 U6.5 U6.14 U6.23 U6.24 U7.2 U7.5 U8.3 | length 82.4
  Component Side w0.2: C5.1 9.075,17.575 v1(10.7,17.575) ; C10.2@27.15,50.225 27.15,52.675 TP10.1
  Component Side w0.25: v1(3.9,11.3) 3.875,11.275 C7.1 5.625,11.6 5.875,11.6 6.2,11.925 U4.2 ; v1(4,14.3) 4,15.7 C6.1 ; C7.1@5.25,11.275 C7.1@5.275,11.3 ; v1(10.7,16.525) 10.775,16.6 U2.3 ; v1(10.7,17.575) 10.725,17.6 U2.1 ; C8.1 v1@12,11.275 ; v1(13.025,13.475) 13.025,13.7 13.125,13.8 R11.1 ; v1(14.625,18.8) C2.1@15.4,18.8 ; C4.1@17.55,15.375 17.575,15.35 v1(18.925,15.35) v1@19.052,15.35 ; C11.1 v1(20.55,12.2) ; U7.5 U7.2 ; v1(20.098,16.148) 20.55,16.6 C3.1 ; C1.1 21.5,11.5 v1(21.775,11.225) 22.375,11.825 U6.1 U6.2 23.9,10.813 24.213,10.5 24.875,10.5 25.2,10.825 U6.4 U6.5 ; U6.24 25.85,16.25 25.95,16.15 26.5,16.15 U6.23 ; v1(31.675,13.675) 31.675,11.85 U6.14
  Component Side w0.3: 22.525,50.525 D6.2
  Component Side w0.5: P3.10@27,44.95 27,50.075 C10.2@27.15,50.225
  Solder Side w0.2: v1(4.575,32.3) 4.575,32.325 4.89,32.64 U5.3 ; C12.1 6,41.8 v1(6,42.575) ; U8.3@12.725,4.187 12.725,3.413 12.725,3.275 12.725,0.675 14.475,0.675 14.4,0.75 14.4,1.175 ; v1(29.475,22.025) v1@29.5,22
  Solder Side w0.25: U5.7 6.16,37.46 v1(6.175,37.475) ; v2(8.5,22.225) 8.973,22.698 D8.2 ; C9.1@10.175,8.425 10.325,8.575 U3.11@11.575,8.575 ; P2.2 v1(11.5,21.825) ; v5(11.775,8.375) 12.025,8.625 U3.7 ; v2(23.275,22.05) 23.7,22.475 D9.2 ; v1(25.475,32.275) 25.6,32.275 25.675,32.35 C13.1 ; U1.8 28.37,31.155 v1(28.4,31.125) ; P1.2 v1@29.5,22 ; v1(29.64,31.135) U1.7 ; U1.3@30.875,37.8 v1(30.875,39.55)
  Solder Side w0.254: v2(8.7,5.375) 11.875,5.375 12.725,4.525 12.725,4.325 U8.3@12.725,4.187
  Solder Side w0.3: C14.1 C9.1
  Solder Side w0.5: v1(1.702,6.375) 1.625,6.375 1.6,6.35 Q3.2 ; Q1.2 19.875,6.1 20.75,6.975 v1(20.75,7.875) ; Q2.2 27.8,6.1 28.225,6.525 v1(28.225,7.875)
  other v1: 12.125,11.4 26.525,16.125
  other v2: 9.5,1.2 10.456,1.2 11.412,1.2 12.369,1.2 13.325,1.2 1.025,1.225 6.65,3.3 7.65,3.3 8.65,3.3 6.325,7.6 7.225,7.625 3,26.1 22.1,49.4 20.35,50.125 22.1,50.125 18.725,50.15 18.75,50.875 22.1,50.9
  other v3: 21.275,2.75 34.1,2.825 4.65,3 17.2,4.025 17.2,5.1 17.2,6.2 17.2,7.275 1.525,10.375 34.975,11 34.85,17.15 1.45,20.275 34.775,27.525 34.525,38.4 23.275,47.2 34.65,47.975 1.125,48.3 11.575,51.175 1.475,54.35 10.35,54.475 30.275,54.525 21.075,54.65
  other v5: 12.525,8.025 13.275,8.375 12.525,8.725
GREEN_L: R16.1 U6.18 | length 11.9
  Component Side w0.25: R16.1 24.675,25.85 24.5,25.675 24.5,22.825 24.875,22.45 25.962,22.45 29.75,18.662 U6.18
GREEN_R: R13.1 U6.21 | length 22.7
  Component Side w0.25: R13.1 11.075,25.15 11.075,23.35 11.425,23 13.889,23 16.239,20.65 25.852,20.65 27.8,18.702 U6.21
HEATER1_N: P1.4 P3.2 TP5.1 | length 44.7
  Component Side w0.2: TP5.1 11,46 P3.2
  Solder Side w1: P3.2 11,43.95 9.575,42.525 9.575,32.603 13.975,28.203 13.975,23.2 18.55,18.625 24.05,18.625 24.5,19.075 P1.4
HEATER1_P: P1.5 P3.3 TP7.1 | length 39.5
  Component Side w0.2: TP7.1 13,47 P3.3
  Solder Side w1: P3.3 13,44.253 10.775,42.028 10.775,33.1 14.875,29 19.9,29 22,26.9 P1.5
HEATER2_N: P2.4 P3.4 TP9.1 | length 47
  Component Side w0.2: TP9.1 15,48 P3.4
  Solder Side w1: P2.4 6.5,20.725 4.85,22.375 4.85,30.225 2.15,32.925 2.15,44.453 4.747,47.05 13.527,47.05 15,45.576 P3.4
HEATER2_P: P2.5 P3.5 TP8.1 | length 50.4
  Component Side w0.2: TP8.1 17,49 P3.5
  Solder Side w1: P2.5 4,20.725 0.95,23.775 0.95,44.95 4.25,48.25 14.024,48.25 17,45.274 P3.5
NetC2_2: C2.2 R4.1 U2.4 | length 14.2
  Component Side w0.25: v1(11.6,15.075) 11.765,15.24 U2.4 ; v1@14.375,17.575 14.4,17.55 v1(14.6,17.55) C2.2@15.75,17.55 ; C2.2 17.325,17.575 R4.1
  Solder Side w0.25: v1(11.6,15.075) 11.125,15.55 10.5,15.55 9.9,16.15 9.9,17.925 11.125,19.15 13.425,19.15 13.85,18.725 13.85,18.125 14.425,17.55 v1(14.6,17.55)
NetC3_2: C3.2 P1.1 R3.1 R4.2 TP13.1 | length 20.3
  Component Side w0.25: R4.2 20.525,19.15 C3.2 21.5,18.225 ; v1(22,16.7) 22,17.725 21.5,18.225 ; TP13.1 21.5,18.275 21.5,18.225
  Solder Side w0.25: v1(22,16.7) 22.126,16.826 24.664,16.826 25.589,17.75 31.65,17.75 32,18.1 P1.1 P1.1@31.925,20.35
NetC5_2: C5.2 R7.1 U2.5 | length 7.1
  Component Side w0.25: R7.1 C5.2@8.775,15.675 ; C5.2 9.05,15.45 10,15.45 11.15,14.3 11.925,14.3 12.4,14.775 U2.5
NetC6_2: C6.2 P2.1 R5.1 R7.2 TP14.1 | length 18.3
  Component Side w0.25: C6.2 R5.1@5.6,17.325 ; TP14.1 5.6,19.75 R5.1@5.6,17.325 ; R5.1 R5.1@5.6,17.325 ; R7.2@7.175,17.325 R5.1@5.6,17.325 ; R7.2 v1(7.225,18.6)
  Solder Side w0.25: v1(7.225,18.6) 9.8,18.6 10.25,19.05 10.25,21.775 11.025,22.55 11.8,22.55 14,20.35 P2.1
NetC11_2: C11.2 R10.1 U2.7 | length 11.6
  Component Side w0.25: U2.7 13.575,16.6 14.075,16.1 v1(14.075,15.825) ; R10.1 C11.2@19.1,13.775 ; C11.2@19.075,13.85 C11.2 v1(20.15,14.825)
  Solder Side w0.25: v1(14.075,15.825) 16.625,15.825 18.2,14.25 19.575,14.25 v1(20.15,14.825)
NetD1_2: D1.2 J1.2 Q1.3 TP1.1 | length 10.7
  Component Side w0.2: TP1.1 20.8,3.7 J1.2
  Component Side w0.5: J1.2 v1@24.575,4.45
  Solder Side w0.5: Q1.3 21,4.875 21.62,4.255 D1.2 24.43,4.255 v1(24.575,4.4)
NetD2_2: D2.2 J2.2 Q2.3 TP2.1 | length 10.1
  Component Side w0.2: v1(32.295,4.355) TP2.1@34.43,4.355
  Component Side w0.5: J2.2 28.72,4.355 v1(32.295,4.355)
  Solder Side w0.5: Q2.3 29.05,4.65 29.42,4.28 D2.2 32.295,4.28 v1(32.295,4.355)
NetD3_2: D3.2 J4.2 Q3.3 TP3.1 | length 12.1
  Component Side w0.2: TP3.1 1.7,3.275 2.875,4.45 J4.2
  Component Side w0.5: J4.2 v1@8.645,4.45
  Solder Side w0.5: Q3.3 5.45,4.775 5.895,4.33 D3.2 v1(8.645,4.33)
NetD4_1: D4.1 R13.2 TP18.1 | length 6.9
  Component Side w0.25: R13.2 8.25,27.05 9.3,28.1 v1(9.75,28.1) 11.1,28.1 TP18.1
  Solder Side w0.25: v1(9.75,28.1) 10.532,27.318 D4.1
NetD4_2: D4.2 R14.2 TP19.1 | length 11.4
  Component Side w0.25: v1(7.975,28.025) 8.975,29.025 10.37,29.025 ; TP19.1 10.37,30.22 10.37,29.025 ; R14.2 12.75,26.475 12.75,28.429 12.154,29.025 10.37,29.025
  Solder Side w0.25: D4.2 7.332,27.382 v1(7.975,28.025)
NetD4_3: D4.3 R15.2 TP20.1 | length 10.4
  Component Side w0.25: R15.2@8,23.75 R15.2 8.25,23.725 v2(7.35,22.825) 7.35,21.873 7.848,21.375 TP20.1
  Solder Side w0.25: v2(7.35,22.825) 7.825,23.3 8.4,23.3 8.975,23.875 9.915,23.875 D4.3 D4.3@10,23.96
NetD5_1: D5.1 R16.2 TP21.1 | length 6.9
  Component Side w0.25: R16.2 27.425,27.9 v2(27.825,28.3) 28.3,27.825 TP21.1
  Solder Side w0.25: v2(27.825,28.3) 28.532,27.593 D5.1
NetD5_2: D5.2 R17.2 TP22.1 | length 7.3
  Component Side w0.25: R17.2 23.325,26.775 24.55,28 v1(25.45,28) 25.45,28.95 TP22.1
  Solder Side w0.25: D5.2@25.112,26.562 D5.2 v1@25.332,27.882
NetD5_3: D5.3 R18.2 TP23.1 | length 7.4
  Component Side w0.25: R18.2 27.425,22.8 28.2,22.025 v1(28.2,22) 29.325,20.875 TP23.1
  Solder Side w0.25: v1(28.2,22) 28.2,22.25 28.532,22.582 D5.3
NetJ7_2: J7.2 R21.2 U8.1 | length 5.9
  Component Side w0.254: J7.2@11.3,4.725 11.575,4.45 J7.2 ; J7.2@13.6,4.45 J7.2@13.926,4.776
  Solder Side w0.2: U8.1@13.725,3.413 13.725,3.275 13.725,3.025 13.791,2.959 13.916,2.959 14.925,3.967 v6(14.925,4.425) ; U8.1@13.725,4.325 13.725,4.85 R21.2 R21.2@14.125,5.35
NetQ1_1: Q1.1 R1.2 | length 4.6
  Solder Side w0.254: Q1.1 18.8,4.8 18.25,5.35 18.25,7.3 18.65,7.7 R1.2
NetQ2_1: Q2.1 R2.2 | length 4.1
  Solder Side w0.254: R2.2 26.1,7 26.1,5.25 26.55,4.8 Q2.1
NetQ3_1: Q3.1 R8.2 | length 7.8
  Solder Side w0.254: R8.2 1.575,7.95 0.975,7.35 0.975,5.525 1.45,5.05 Q3.1
NetR1_1: R1.1 U6.9 | length 10.7
  Component Side w0.254: v1(28.1,10.4) 28.1,10.5 28.45,10.85 U6.9
  Signal Layer 1 w0.254: v1@28.075,10.4 v1(28.1,10.4)
  Solder Side w0.254: R1.1 20.35,10.225 27.925,10.225 v1(28.1,10.4)
NetR2_1: R2.1 U6.10 | length 4.6
  Component Side w0.254: v1(29.1,10.425) U6.10
  Solder Side w0.254: R2.1 28.5,9.225 29.1,9.825 v1(29.1,10.425)
NetR8_1: R8.1 U6.11 | length 55.5
  Component Side w0.2: v1(2.775,0.9) 3.3,0.375 25.15,0.375 v1(27.5,2.725) ; U6.11 29.75,10.825 30.175,10.4 v1(30.175,10.425)
  Solder Side w0.2: v1(2.775,0.9) 2.775,3.035 0.548,5.262 0.548,7.527 1.946,8.925 4.975,8.925 5.25,8.65 R8.1 ; v1(27.5,2.725) 32.2,2.725 33.55,4.075 33.55,7.05 v1(30.175,10.425)
NetR9_1: R9.1 R10.2 R11.2 | length 3.3
  Component Side w0.25: R11.2 17.525,12.2 R10.2
NetR20_1: R20.1 U3.2 | length 0.8
  Solder Side w0.2: U3.2 13.025,6.3 R20.1@13.125,6.2
NetR21_1: R21.1 U3.1 | length 1
  Solder Side w0.2: U3.1 13.525,6.8 R21.1@14.125,6.2
RED_L: R17.1 U6.19 | length 8.8
  Component Side w0.25: R17.1@23.181,23.431 24.666,21.945 25.83,21.945 29.1,18.675 U6.19
RED_R: R14.1 U6.20 | length 19.4
  Component Side w0.25: R14.1 12.525,24.025 12.95,23.6 13.925,23.6 16.425,21.1 26.039,21.1 28.45,18.689 U6.20
SCL: TP12.1 U1.4 U2.10 U3.9 U5.4 U6.26 U7.3 | length 128.8
  Component Side w0.25: TP12.1 4.062,42.388 4.088,42.388 ; U2.10 12.4,18.081 12.056,18.425 v1(11.725,18.425) 10.95,19.2 8.75,19.2 5.4,22.55 5.4,35.475 v1(4.725,36.15) 4.725,37.7 4.725,41.75 4.088,42.388 ; U7.3 21.025,51.45 v7(20.95,51.525) 19.7,52.775 3.9,52.775 2.1,50.975 2.1,44.375 4.088,42.388 ; v1(24.55,16.075) U6.26
  Solder Side w0.25: U5.4 3.62,35.695 4.075,36.15 v1(4.725,36.15) ; v1(11.725,18.425) 12.05,18.425 12.675,17.8 12.675,15.3 14,13.975 14,11.586 13.025,10.611 U3.9 ; v7(20.95,51.525) 21.175,51.75 24.65,51.75 32.13,44.27 32.13,37.815 U1.4 32.18,35.605 31.55,34.975 31.55,31.575 30.75,30.775 30.75,26.2 33.75,23.2 33.75,18.311 32.739,17.3 25.775,17.3 v1(24.55,16.075)
SCL_IN: P3.8 U7.1 | length 5.5
  Component Side w0.25: U7.1 21.025,46.925 P3.8
SDA: TP11.1 U1.5 U2.9 U3.10 U5.5 U6.27 U7.4 | length 133.7
  Component Side w0.25: 2.575,47.425 TP11.1 ; U2.9@13.125,17.69 v1(13.125,18.425) 11.9,19.65 8.936,19.65 5.85,22.736 v1(5.85,36.325) 5.175,37 5.175,41.936 2.55,44.561 2.55,50.789 4.086,52.325 19.451,52.325 19.675,52.101 v7(19.675,51.55) U7.4 ; v1(23.526,16.101) 23.9,16.475 U6.27
  Solder Side w0.25: U5.5 3.62,37.705 4.45,36.875 5.3,36.875 v1(5.85,36.325) ; v1(13.125,18.425) 13.125,15.486 14.45,14.161 14.45,11.4 13.525,10.475 U3.10 ; v7(19.675,51.55) 20.325,52.2 24.836,52.2 32.58,44.456 32.58,40.095 33.125,39.55 33.125,33.15 32.81,32.835 U1.5 32.18,31.569 31.2,30.589 31.2,26.4 34.2,23.4 34.2,18.125 32.925,16.85 25.961,16.85 25.55,16.439 25.55,15.925 24.975,15.35 23.775,15.35 23.526,15.599 v1(23.526,16.101)
SDA_IN: P3.7 U7.6 | length 5.2
  Component Side w0.25: U7.6 20.575,48.725 20.575,46.739 20.975,46.339 20.975,44.975 P3.7
USB_GND: R19.1 | length 3
  Solder Side w1: v4(19.25,-0.8) 19.55,-0.5 R19.1
  other v4: 15.175,-0.8 16.475,-0.8 17.85,-0.8 20.8,-0.8
pads on no net: Fid1. Fid2. Fid3. Fid4. Fid5. Fid6. P1.0 P2.0 SP1.0 U1.6 U2.2 U3.3 U3.4 U3.5 U3.6 U4.4 U5.6 U6.6 U6.7 U6.8 U6.12 U6.13 U6.15 U6.16 U8.4 U8.5

## Polygon pours and split planes (outlines as drawn)
USB_GND on Signal Layer 2 "USB_GND" (solid, remove dead copper, pour order 12): 14,-1.25 14,-0.75 ccw(c13.25,-0.75) 13.25,0 22.75,0 ccw(c22.75,-0.75) 22,-0.75 22,-1.25 cw(c21.25,-1.25) 21.25,-2 14.75,-2 cw(c14.75,-1.25)
GND on Signal Layer 2 "GND" (solid, remove dead copper, pour order 36): 13.25,0 cw(c13.25,-0.75) 14,-0.75 14,-1.25 ccw(c14.75,-1.25) 14.75,-2 21.25,-2 ccw(c21.25,-1.25) 22,-1.25 22,-0.75 cw(c22.75,-0.75) 22.75,0 35.25,0 ccw(c35.25,0.75) 36,0.75 36,55.05 ccw(c35.25,55.05) 35.25,55.8 0.75,55.8 ccw(c0.75,55.05) 0,55.05 0,0.75 ccw(c0.75,0.75) 0.75,0
NetJ7_2 on Signal Layer 2 "SHIELD" (solid, remove dead copper, pour order 32): 16.4,7 15.95,7.475 15.925,7.475 15.925,7.5 15.725,7.7 10.725,7.7 10.198,7.7 10.033,7.536 9.32,6.822 9.32,4.813 9.32,2.63 10.15,1.8 14.4,1.8 15.029,2.429 16.4,3.8
USB_GND on Signal Layer 1 "USB_GND" (solid, remove dead copper, pour order 11): 14,-1.25 14,-0.75 ccw(c13.25,-0.75) 13.25,0 22.75,0 ccw(c22.75,-0.75) 22,-0.75 22,-1.25 cw(c21.25,-1.25) 21.25,-2 14.75,-2 cw(c14.75,-1.25)
GND on Signal Layer 1 "GND" (solid, remove dead copper, pour order 38): 13.25,0 cw(c13.25,-0.75) 14,-0.75 14,-1.25 ccw(c14.75,-1.25) 14.75,-2 21.25,-2 ccw(c21.25,-1.25) 22,-1.25 22,-0.75 cw(c22.75,-0.75) 22.75,0 35.25,0 ccw(c35.25,0.75) 36,0.75 36,55.05 ccw(c35.25,55.05) 35.25,55.8 0.75,55.8 ccw(c0.75,55.05) 0,55.05 0,0.75 ccw(c0.75,0.75) 0.75,0
NetJ7_2 on Signal Layer 1 "SHIELD" (solid, remove dead copper, pour order 31): 16.4,7 15.95,7.475 15.925,7.475 15.925,7.5 15.725,7.7 10.725,7.7 10.198,7.7 10.033,7.536 9.32,6.822 9.32,4.813 9.32,2.63 10.15,1.8 14.4,1.8 15.029,2.429 16.4,3.8
USB_GND on Solder Side "USB_GND" (solid, remove dead copper, pour order 13): 14,-1.25 14,-0.75 ccw(c13.25,-0.75) 13.25,0 22.75,0 ccw(c22.75,-0.75) 22,-0.75 22,-1.25 cw(c21.25,-1.25) 21.25,-2 14.75,-2 cw(c14.75,-1.25)
GND on Solder Side "GND" (solid, remove dead copper, pour order 37): 13.25,0 cw(c13.25,-0.75) 14,-0.75 14,-1.25 ccw(c14.75,-1.25) 14.75,-2 21.25,-2 ccw(c21.25,-1.25) 22,-1.25 22,-0.75 cw(c22.75,-0.75) 22.75,0 35.25,0 ccw(c35.25,0.75) 36,0.75 36,55.05 ccw(c35.25,55.05) 35.25,55.8 0.75,55.8 ccw(c0.75,55.05) 0,55.05 0,0.75 ccw(c0.75,0.75) 0.75,0
NetJ7_2 on Solder Side "SHIELD" (solid, remove dead copper, pour order 28): 16.4,7 15.95,7.475 15.925,7.475 15.925,7.5 15.725,7.7 12.35,7.7 12.35,1.8 14.4,1.8 15.029,2.429 16.4,3.8
USB_GND on Component Side "USB_GND" (solid, remove dead copper, pour order 9): 14,-1.25 14,-0.75 ccw(c13.25,-0.75) 13.25,0 22.75,0 ccw(c22.75,-0.75) 22,-0.75 22,-1.25 cw(c21.25,-1.25) 21.25,-2 14.75,-2 cw(c14.75,-1.25)
GND on Component Side "GND" (solid, remove dead copper, pour order 39): 13.25,0 cw(c13.25,-0.75) 14,-0.75 14,-1.25 ccw(c14.75,-1.25) 14.75,-2 21.25,-2 ccw(c21.25,-1.25) 22,-1.25 22,-0.75 cw(c22.75,-0.75) 22.75,0 35.25,0 ccw(c35.25,0.75) 36,0.75 36,55.05 ccw(c35.25,55.05) 35.25,55.8 0.75,55.8 ccw(c0.75,55.05) 0,55.05 0,0.75 ccw(c0.75,0.75) 0.75,0
NetJ7_2 on Component Side "SHIELD" (solid, remove dead copper, pour order 30): 16.4,7 15.95,7.475 15.925,7.475 15.925,7.5 15.725,7.7 10.725,7.7 10.198,7.7 10.033,7.536 9.32,6.822 9.32,4.813 9.32,2.63 10.15,1.8 14.4,1.8 15.029,2.429 16.4,3.8

## Keep-outs
Keep-Out Layer:
  the board outline again, w0.001

## Other copper
Component Side:
  rectangle net GND: 10.375,7.65 13.525,9.35
  pour cut-out: 13.25,0.408 23.167,0.408 23.167,0 21.732,0 14.268,0 13.25,0
  text "Copper Top 35u" at 5.175,75.075 h1.52
Signal Layer 1:
  rectangle net GND: 11.15,7.675 13.9,9.2
  pour cut-out: 13.25,0.408 23.167,0.408 23.167,0 21.732,0 14.268,0 13.25,0
  text "Signal Layer 1 35u" at 5.175,72.225 h1.52
Signal Layer 2:
  rectangle net GND: 11.275,7.675 14.025,9.2
  pour cut-out: 13.25,0.408 23.167,0.408 23.167,0 21.732,0 14.268,0 13.25,0
  text "Signal Layer 2 35u" at 5.025,69.725 h1.52
Solder Side:
  rectangle net GND: 8.899,22.285 9.18,22.624
  rectangle net GND: 8.627,21.978 9.146,22.148
  rectangle net GND: 8.627,22.148 9.546,22.352
  pour cut-out: 14.075,4.55 13.825,4.55 13.825,3.25 14.043,3.25 14.079,3.286 14.075,3.29
  pour cut-out: 14.675,5.625 14.425,5.625 14.425,4.975 14.68,4.975
  pour cut-out: 20.55,0.75 20.458,0.75 20.458,0.408 20.541,0.325 20.55,0.325
  pour cut-out: 18.55,0.75 18.642,0.75 18.642,0.408 18.55,0.05
  pour cut-out: 13.25,0.408 23.167,0.408 23.167,0 21.732,0 14.268,0 13.25,0
  text "Copper Bottom 35u" at 5.175,67.15 h1.52

## Silkscreen, mask and mechanical layers (free items; w line width, h text height)
Top Overlay:
  text "SilkScreen Black" at 5.3,61.625 h1.52
  text "Top" at 33.875,54.9 h1 r270
  text "l" at 28.175,1.275 h2 r270
  text "Sensor" at 11.875,0.275 h0.8
  text "l" at 6.475,0.025 h2 r90
  text "l" at 21.1,-0.675 h2
Bottom Overlay:
  text "Bottom" at 33.975,49.35 h1 r270
  text "e" at 18.425,6.8 h6
  text "2012-K" at 7.15,1.1 h1
  text "Print Head PCB" at 37.425,0.875 h1
Top Solder:
  rectangle: 13.25,-2 22.75,0
  text "Soldermask White" at 4.675,64.2 h1.52
Bottom Solder:
  rectangle: 13.25,-2 22.75,0
Board Outline:
  the board outline again, w0.001
  text "PCB Thickness 1mm" at 5.35,78.275 h1.52